# EAGLE board NICBP v3 (EAGLE 8.1.0)
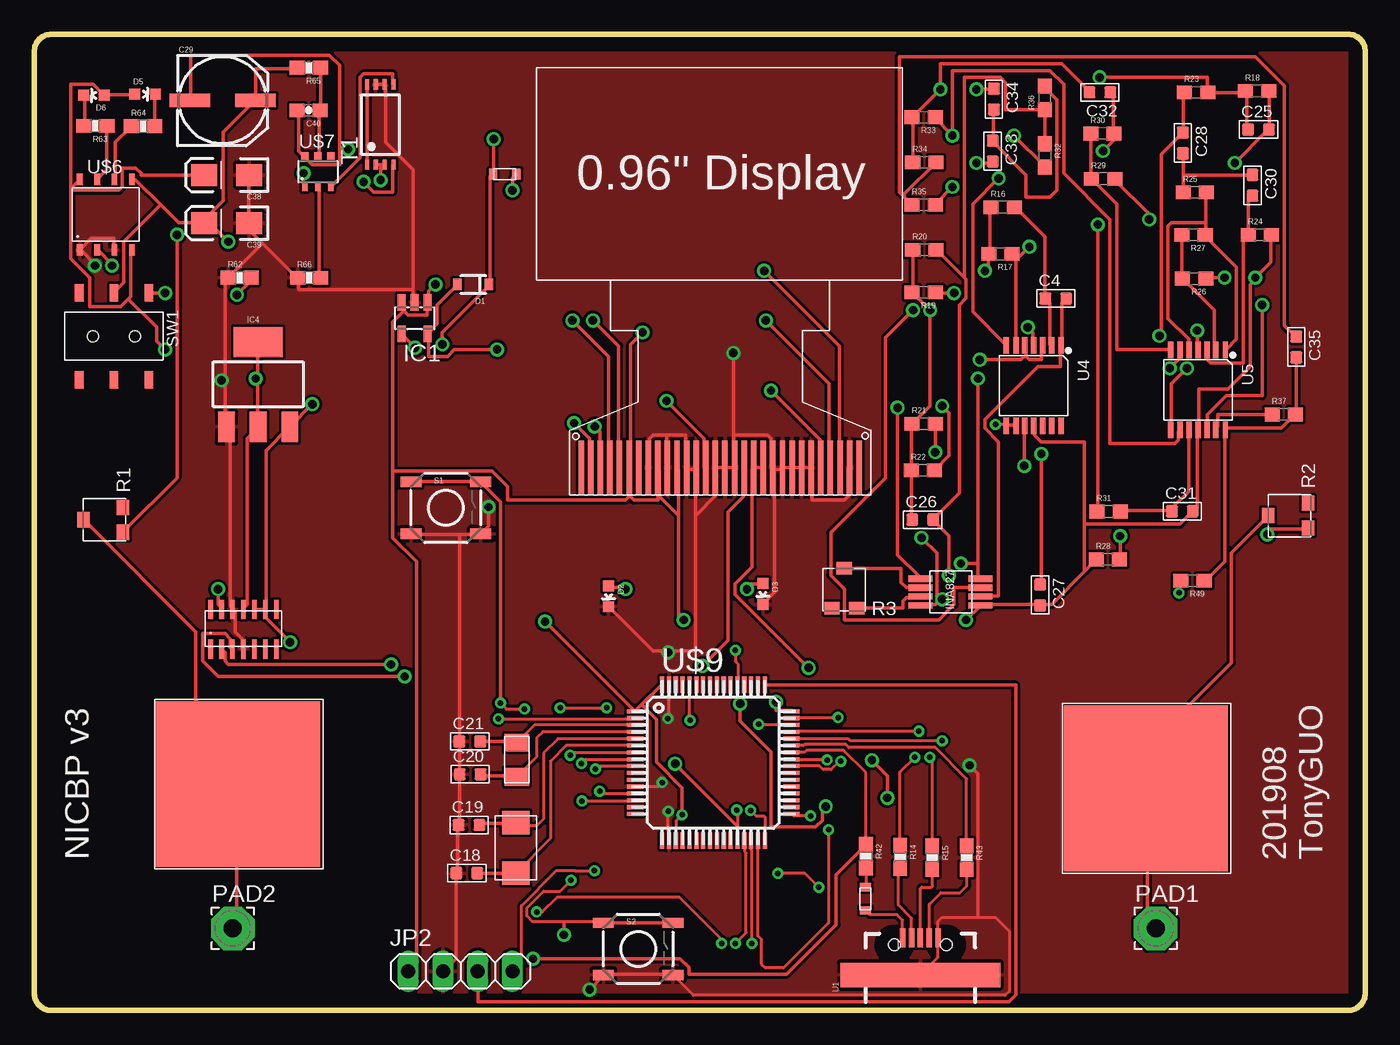
[diagram p0: board, top side]
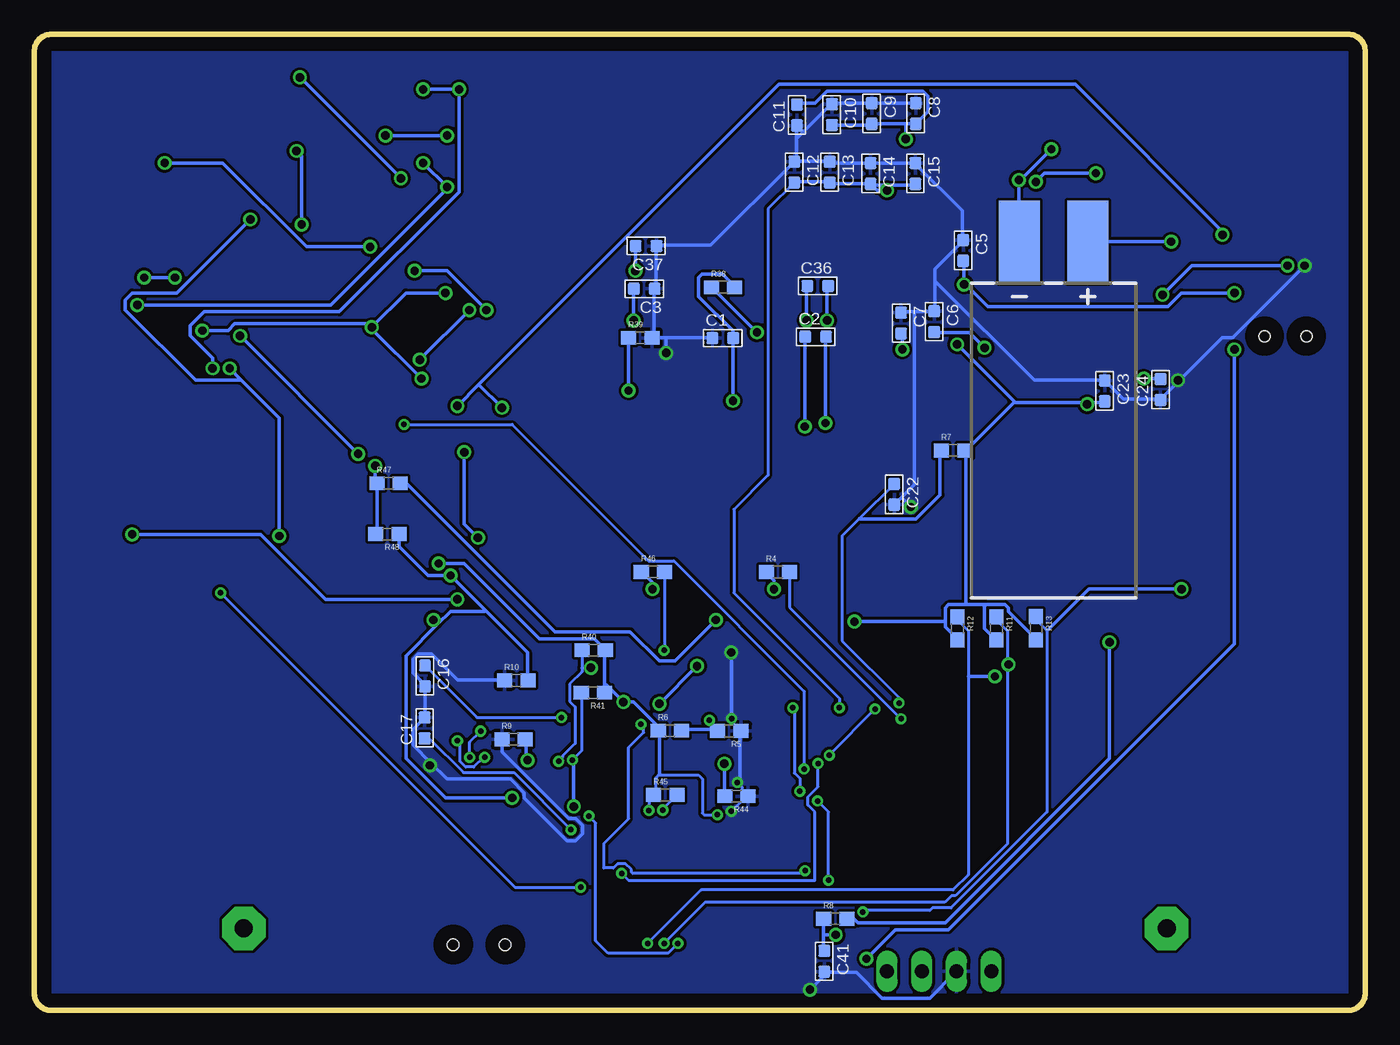
[diagram p1: board, bottom side, seen from below]

Size 97.2 x 71.3 mm. Coordinates in mm from the lower left corner, seen from the top.
Outline: 1.27,71.3 95.93,71.3 arc-90 97.2,70.03 97.2,1.27 arc-90 95.93,0 1.27,0 arc-90 0,1.27 0,70.03 arc-90 1.27,71.3
Copper layers (1*16): Top 0.035mm / dielectric 1.5mm / Bottom 0.035mm
Design rules "default": minimum track width 10mil, minimum drill 24mil, track to track 8mil, track to pad 8mil, pad to pad 8mil, via to via 8mil, smd to smd 8mil, copper to edge 40mil, drill to drill 8mil, minimum pad ring 10mil, minimum via ring 8mil, stop-mask expansion 4mil, vias tented up to drill 0mil, thermal gap 10mil

## Footprints (pad centres in the part's own frame; a part is rotated, then mirrored left to right if it is on the bottom)
LIPO-110-TABS = smd 3 x 6: + 2.5,14.5; - -2.5,14.5
C0603 = smd 0.889 x 0.889: 1 0,0.762; 2 0,-0.762
NIPPON_F80 = smd 2.95 x 1: + 2.4,0; - -2.4,0
EIA3216-KIT = smd 1.9 x 1.6: A 1.65,0; C -1.65,0
0603-CAP = smd 1.1 x 1: 1 -0.85,0; 2 0.85,0
SOD-323 = smd 0.63 x 0.83: 1 -1.15,0; 2 1.15,0
LED-0603 = smd 0.8 x 0.8: A 0,-0.75; C 0,0.75
SOT23-5L = smd 0.6 x 1.2: 1 -0.95,-1.15; 2 0,-1.15; 3 0.95,-1.15; 4 0.95,1.15; 5 -0.95,1.15
SOT223 = smd 1.219 x 2.235: 1 -2.311,-3.099; 2 0,-3.099; 3 2.311,-3.099 | smd 3.6 x 2.2: 4 0,3.099
1X04 = drill 1.016 long: 1 -3.81,0; 2 -1.27,0; 3 1.27,0; 4 3.81,0
3,17/1,3 = drill 1.321 pad 3.175 octagon: 1 0,0
TRIMPOT_TC33 = smd 1.1 x 0.9: 1 -0.91,-1.45; 2 0,1.45; 3 0.91,-1.45
0603 = smd 1.1 x 1: 1 -0.85,0; 2 0.85,0
0603-RES = smd 1.1 x 1: 1 -0.85,0; 2 0.85,0
TACTILE_SWITCH_SMD = smd 1.524 x 0.762: 1 -2.54,1.905; 2 2.54,1.905; 3 -2.54,-1.905; 4 2.54,-1.905
SW6-2.54-SMD-7.0X3.5X1.5MM = smd 1.27 x 0.635: CH1A -3.175,2.54; CH1B -3.175,-2.54; CH2A 3.175,2.54; CH2B 3.175,-2.54; COM1 -3.175,0; COM2 3.175,0 | hole 0.813: 0,1.524; 0,-1.524
TSSOP-8 = smd 0.3 x 0.75: 1 -0.975,-2.925; 2 -0.325,-2.925; 3 0.325,-2.925; 4 0.975,-2.925; 5 0.975,2.925; 6 0.325,2.925; 7 -0.325,2.925; 8 -0.975,2.925
USB-MICRO-SMD = smd 1.4 x 0.4: D+1 2.7,0; D-1 2.7,0.65; GND1 2.7,-1.3; ID1 2.7,-0.65; VBUS1 2.7,1.3 | smd 1.778 x 11.684: GND 0,0 | hole 0.85: 2.2,1.9; 2.2,-1.9
TSSOP14-0.65-5X4.4MM = smd 0.4 x 1.2: 1 -2,-2.925; 2 -1.3,-2.925; 3 -0.65,-2.925; 4 0,-2.925; 5 0.65,-2.925; 6 1.3,-2.925; 7 2,-2.925; 8 2,2.925; 9 1.3,2.925; 10 0.65,2.925; 11 0,2.925; 12 -0.65,2.925; 13 -1.3,2.925; 14 -2,2.925
NX5032CA-8MHZ = smd 1.7 x 2: 1 0,0; 2 3.7,0
FCM1608KF-601T03 = smd 0.6 x 0.8: 1 -0.05,0.4; 2 1.65,0.4
32.768KHZ-FC-135 = smd 1.3 x 1.8: 1 0,0; 2 2.5,0
INA827 = smd 1.75 x 0.45: 1 -3,3; 2 -3,2.35; 3 -3,1.7; 4 -3,1.05; 5 1.4,1.05; 6 1.4,1.7; 7 1.4,2.35; 8 1.4,3
SOT23-8 = smd 0.42 x 0.835: 1 -1.905,-2.58; 2 -0.635,-2.58; 3 0.635,-2.58; 4 1.905,-2.58; 5 1.905,2.58; 6 0.635,2.58; 7 -0.635,2.58; 8 -1.905,2.58
SOT23-6 = smd 0.4 x 0.55: 1 -0.95,-1.15; 2 0,-1.15; 3 0.95,-1.15 | smd 0.55 x 0.55: 4 0.95,1.15; 5 0,1.15; 6 -0.95,1.15
CAPSENSE_PAD = smd 12 x 6.1: P$1 0,3; P$2 0,-3
TQFP64 = smd 1.2 x 0.3: 1 -5.7,3.75; 2 -5.7,3.25; 3 -5.7,2.75; 4 -5.7,2.25; 5 -5.7,1.75; 6 -5.7,1.25; 7 -5.7,0.75; 8 -5.7,0.25; 9 -5.7,-0.25; 10 -5.7,-0.75; 11 -5.7,-1.25; 12 -5.7,-1.75; 13 -5.7,-2.25; 14 -5.7,-2.75; 15 -5.7,-3.25; 16 -5.7,-3.75; 33 5.7,-3.75; 34 5.7,-3.25; 35 5.7,-2.75; 36 5.7,-2.25; 37 5.7,-1.75; 38 5.7,-1.25; 39 5.7,-0.75; 40 5.7,-0.25; 41 5.7,0.25; 42 5.7,0.75; 43 5.7,1.25; 44 5.7,1.75; 45 5.7,2.25; 46 5.7,2.75; 47 5.7,3.25; 48 5.7,3.75 | smd 0.3 x 1.2: 17 -3.75,-5.7; 18 -3.25,-5.7; 19 -2.75,-5.7; 20 -2.25,-5.7; 21 -1.75,-5.7; 22 -1.25,-5.7; 23 -0.75,-5.7; 24 -0.25,-5.7; 25 0.25,-5.7; 26 0.75,-5.7; 27 1.25,-5.7; 28 1.75,-5.7; 29 2.25,-5.7; 30 2.75,-5.7; 31 3.25,-5.7; 32 3.75,-5.7; 49 3.75,5.7; 50 3.25,5.7; 51 2.75,5.7; 52 2.25,5.7; 53 1.75,5.7; 54 1.25,5.7; 55 0.75,5.7; 56 0.25,5.7; 57 -0.25,5.7; 58 -0.75,5.7; 59 -1.25,5.7; 60 -1.75,5.7; 61 -2.25,5.7; 62 -2.75,5.7; 63 -3.25,5.7; 64 -3.75,5.7
MAX30100 = smd 1.397 x 0.35: 1 -0.381,4.8; 2 -0.381,4; 3 -0.381,3.2; 4 -0.381,2.4; 5 -0.381,1.6; 6 -0.381,0.8; 7 -0.381,0; 8 2.531,0; 9 2.531,0.8; 10 2.531,1.6; 11 2.531,2.4; 12 2.531,3.2; 13 2.531,4; 14 2.531,4.8
ER-OLED0.96 = smd 0.4 x 4: P$1 0.85,2; P$2 1.55,2; P$3 2.25,2; P$4 2.95,2; P$5 3.65,2; P$6 4.35,2; P$7 5.05,2; P$8 5.75,2; P$9 6.45,2; P$10 7.15,2; P$11 7.85,2; P$12 8.55,2; P$13 9.25,2; P$14 9.95,2; P$15 10.65,2; P$16 11.35,2; P$17 12.05,2; P$18 12.75,2; P$19 13.45,2; P$20 14.15,2; P$21 14.85,2; P$22 15.55,2; P$23 16.25,2; P$24 16.95,2; P$25 17.65,2; P$26 18.35,2; P$27 19.05,2; P$28 19.75,2; P$29 20.45,2; P$30 21.15,2

## Placement (x,y rotation side)
BAT1  [LIPO-110-TABS]  22.76,41.64 0 bottom
C1  0.1uf  [C0603]  46.92,49.11 90 bottom
C2  1uf  [C0603]  40.14,49.21 90 bottom
C3  4.7uf  [C0603]  52.66,52.71 270 bottom
C4  0.1uf  [C0603]  74.6,52 90 top
C5  0.1uf  [C0603]  29.36,55.51 0 bottom
C6  0.1uf  [C0603]  31.48,50.31 0 bottom
C7  0.1uf  [C0603]  33.9,50.21 0 bottom
C8  0.1uf  [C0603]  32.82,65.51 0 bottom
C9  0.1uf  [C0603]  36.04,65.51 0 bottom
C10  1uf  [C0603]  38.95,65.43 0 bottom
C11  1uf  [C0603]  41.5,65.4 180 bottom
C12  0.1uf  [C0603]  41.69,61.23 0 bottom
C13  0.1uf  [C0603]  39.11,61.23 0 bottom
C14  0.1uf  [C0603]  36.13,61.13 0 bottom
C15  0.1uf  [C0603]  32.85,61.13 0 bottom
C16  2.2uf  [C0603]  68.67,24.43 0 bottom
C17  2.2uf  [C0603]  68.69,20.63 180 bottom
C18  22pF  [C0603]  31.59,10.03 90 top
C19  22pF  [C0603]  31.75,13.55 90 top
C20  12.5pF  [C0603]  31.83,17.25 90 top
C21  12.5pF  [C0603]  31.81,19.65 90 top
C22  0.1uf  [C0603]  34.4,37.7 0 bottom
C23  0.1uf  [C0603]  19.03,45.25 0 bottom
C24  0.1uf  [C0603]  14.95,45.35 180 bottom
C25  0.1uf  [C0603]  89.4,64.34 90 top
C26  0.1uf  [C0603]  64.88,35.84 90 top
C27  0.1uf  [C0603]  73.46,30.34 0 top
C28  0.1uf  [C0603]  83.88,63.36 0 top
C29  100uF  [NIPPON_F80]  13.76,66.46 0 top
C30  0.1uf  [C0603]  88.96,60.26 0 top
C31  0.1uf  [C0603]  83.84,36.46 90 top
C32  0.1uf  [C0603]  77.82,67.06 270 top
C33  0.1uf  [C0603]  70,62.76 0 top
C34  0.1uf  [C0603]  70.08,66.56 0 top
C35  0.22uf  [C0603]  92.16,48.46 0 top
C36  1uf  [C0603]  39.98,52.91 90 bottom
C37  1uf  [C0603]  52.52,55.83 270 bottom
C38  10uF/10v  [EIA3216-KIT]  14.05,61.02 180 top
C39  10uF/10v  [EIA3216-KIT]  14.05,57.5 180 top
C40  0.1uF  [0603-CAP]  20.04,65.74 180 top
C41  0.1uf  [C0603]  39.5,3.6 0 bottom
D1  BAT20JFILM  [SOD-323]  32.06,53.02 180 top
D2  BLUE  [LED-0603]  41.95,30.24 180 top
D3  BLUE  [LED-0603]  53.21,30.42 180 top
D5  BLUE  [LED-0603]  8.1,66.93 270 top
D6  BLUE  [LED-0603]  4.36,66.83 90 top
IC1  LD398530RM  [SOT23-5L]  27.78,50.56 180 top
IC4  LDO_1V8  [SOT223]  16.35,45.73 0 top
JP2  [1X04]  31.12,2.86 0 top
PAD1  [3,17/1,3]  81.9,6 0 top
PAD2  [3,17/1,3]  14.5,6 0 top
R1  1M  [TRIMPOT_TC33]  5.04,35.84 90 top
R2  1M  [TRIMPOT_TC33]  91.56,36.14 90 top
R3  100k  [TRIMPOT_TC33]  59.15,30.84 0 top
R4  1k  [0603]  42.89,32.02 0 bottom
R5  10k  [0603]  46.44,20.42 180 bottom
R6  10k(N.M)  [0603]  50.78,20.44 0 bottom
R7  10k  [0603]  30.1,40.9 0 bottom
R8  10k  [0603]  38.7,6.7 0 bottom
R9  0R  [0603]  62.2,19.8 0 bottom
R10  0R(N.M)  [0603]  62,24.1 0 bottom
R11  4.7k  [0603]  26.94,27.9 270 bottom
R12  4.7k  [0603]  29.79,27.9 270 bottom
R13  4.7k  [0603]  24.05,27.92 270 bottom
R14  22R  [0603-RES]  63.23,11.22 270 top
R15  22R  [0603-RES]  65.58,11.17 270 top
R16  1M  [0603]  70.72,58.66 0 top
R17  5.1k  [0603]  70.55,55.25 180 top
R18  5.1k  [0603]  89.3,67.15 0 top
R19  10k  [0603]  64.95,52.45 180 top
R20  10k  [0603]  65,55.55 0 top
R21  2M  [0603]  64.95,42.85 0 top
R22  2M  [0603]  64.9,39.45 0 top
R23  100  [0603]  84.85,67.05 0 top
R24  1.8M  [0603]  89.5,56.65 0 top
R25  1.8M  [0603]  84.75,59.75 0 top
R26  12k  [0603]  84.7,53.45 180 top
R27  5.1k  [0603]  84.65,56.64 180 top
R28  12k  [0603]  78.4,32.94 0 top
R29  100k  [0603]  78.05,60.74 0 top
R30  7.5k  [0603]  78,64.04 0 top
R31  7.5k  [0603]  78.45,36.44 0 top
R32  12k  [0603]  73.8,62.44 270 top
R33  5.6k  [0603]  64.95,65.24 180 top
R34  27k  [0603]  65,61.94 0 top
R35  27k  [0603]  64.95,58.84 0 top
R36  9.1k  [0603]  73.8,66.64 90 top
R37  12k  [0603]  91.25,43.53 0 top
R38  10k  [0603]  46.9,52.82 0 bottom
R39  390k  [0603]  52.95,49.12 0 bottom
R40  4.7k  [0603]  56.35,26.31 0 bottom
R41  4.7k  [0603]  56.4,23.21 180 bottom
R42  0  [0603-RES]  60.73,11.27 270 top
R43  0  [0603-RES]  68.08,11.16 270 top
R44  10k  [0603]  45.92,15.65 180 bottom
R45  10k(N.M)  [0603]  51.12,15.74 0 bottom
R46  1k  [0603]  52.02,32.03 0 bottom
R47  1.6M  [0603]  71.32,38.51 0 bottom
R48  4.3M  [0603]  71.42,34.8 180 bottom
R49  0  [0603]  84.58,31.39 180 top
R62  2K  [0603-RES]  15,53.52 0 top
R63  1K  [0603-RES]  4.46,64.6 180 top
R64  1K  [0603-RES]  7.95,64.58 0 top
R65  100R  [0603-RES]  20.05,68.85 180 top
R66  1K  [0603-RES]  20.07,53.51 0 top
S1  [TACTILE_SWITCH_SMD]  30.06,36.71 0 top
S2  [TACTILE_SWITCH_SMD]  44.1,4.5 0 top
SW1  [SW6-2.54-SMD-7.0X3.5X1.5MM]  5.83,49.24 270 top
T1  DMN3024LSD  [TSSOP-8]  25.27,64.7 0 top
U1  [USB-MICRO-SMD]  64.71,2.6 90 top
U4  LM324PW-TSSOP14  [TSSOP14-0.65-5X4.4MM]  72.99,45.64 180 top
U5  LM324PW-TSSOP14  [TSSOP14-0.65-5X4.4MM]  84.98,45.34 180 top
U$2  NX5032CA-8MHZ  [NX5032CA-8MHZ]  35.17,13.73 270 top
U$3  FCM1608KF-601T03  [FCM1608KF-601T03]  33.56,60.67 0 top
U$4  32.768KHZ-FC-135  [32.768KHZ-FC-135]  35.23,19.56 270 top
U$5  INA827  [INA827]  67.71,28.53 0 top
U$6  TP4056  [SOT23-8]  5.23,58.13 0 top
U$7  DW01  [SOT23-6]  20.72,61.25 0 top
U$8  CAPSENSE_PAD  [CAPSENSE_PAD]  81.18,16.23 0 top
U$9  STM32F405R  [TQFP64]  49.6,18.1 0 top
U$10  CAPSENSE_PAD  [CAPSENSE_PAD]  14.88,16.53 0 top
U$12  MAX30100  [MAX30100]  17.68,26.77 90 top
U$13  ER-OLED0.96  [ER-OLED0.96]  39.09,37.64 0 top
U$15  FCM1608KF-601T03  [FCM1608KF-601T03]  61.09,7.36 90 top

## Library data of the parts
BAT1 R1-R3 U$8 U$10 = SparkFun-Electromechanical
C1-C28 C30-C37 C41 = Seeed-OPL-Capacitor; MPN: CC0603KRX5R6BB475
C29 C38 C39 = SparkFun-Capacitors
C40 = SparkFun-Capacitors; PROD_ID: CAP-08390
D1 = SparkFun-DiscreteSemi; PROD_ID: DIO-11623
D2 D3 D5 D6 = SparkFun-LED; PROD_ID: DIO-08575
IC1 = st-microelectronics
IC4 = SparkFun-PowerIC
JP2 = pinhead
PAD1 PAD2 = wirepad
R4-R13 R16-R41 R44-R49 = SparkFun-Resistors; PROD_ID: RES-08609
R14 R15 R42 R43 = SparkFun-Resistors; PROD_ID: RES-07864
R62-R66 = SparkFun-Resistors; PROD_ID: RES-07856
S1 S2 = SparkFun-Electromechanical; PROD_ID: SWCH-08247
SW1 = Seeed-OPL-Switch
T1 = FS8205A
U1 = MicroUSB Long GND
U4 U5 = Seeed-OPL-ic; MPN: LM324PW
U$2 = NX5032CA-8MHZ
U$3 U$15 = FCM1608KF-601T03
U$4 = 32.768KHZ-FC-135
U$5 = INA827
U$6 = TP4056
U$7 = DW01
U$9 = stm32f4
U$12 = MAX30100
U$13 = ER-OLED0.96

## Nets
1V8: C24.2 IC4.2 IC4.4 U$12.11
ADC1: C35.2 R37.2 R49.1 U5.14
AGND: C26.2 C27.2 C31.2 R9.2 R10.2 R20.2 R24.2 R26.1 R28.1 R32.1 R36.1 R48.1 U4.11 U5.11 U$5.5
B1: C41.1 R8.1 S2.1 S2.2 U$9.14
BAT: U4.8 U4.9 U$9.9
BOOT0: R5.2 R6.2 U$9.60
BOOT1: R44.2 R45.2 U$9.28
ECG: R49.2 U$9.8
GND: C1.1 C3.1 C5.1 C6.1 C7.1 C8.1 C9.1 C10.1 C11.1 C12.1 C13.1 C14.1 C15.1 C16.2 C17.2 C18.1 C19.1 C20.1 C21.1 C22.2 C23.1 C24.1 C37.1 C38.C C39.C C41.2 D2.C D3.C IC1.2 IC4.1 JP2.2 R5.1 R9.1 R10.1 R39.2 R44.1 R62.1 R66.1 S1.3 S1.4 S2.3 S2.4 T1.6 T1.7 U1.GND U1.GND1 U$6.1 U$6.3 U$9.12 U$9.18 U$9.63 U$12.4 U$12.12 U$13.P$8 U$13.P$10 U$13.P$12 U$13.P$13 U$13.P$15 U$13.P$16 U$13.P$17 U$13.P$21 U$13.P$22 U$13.P$23 U$13.P$24 U$13.P$25 U$13.P$29
I2C2_SCL: R11.1 U$9.29 U$12.2
I2C2_SDA: R12.1 U$9.30 U$12.3
I2C3_SCL: R41.2 U$9.41 U$13.P$18
I2C3_SDA: R40.1 U$9.40 U$13.P$19 U$13.P$20
INT_EXTI12: R13.1 U$9.33 U$12.13
L_ARM: PAD2.1 R1.2 U$10.P$1 U$10.P$2
LED1: R46.2 U$9.53
LED2: R4.2 U$9.2
MCU_3V3: C8.2 C9.2 C10.2 C11.2 C23.2 D1.1 IC4.3 R6.1 R7.2 R8.2 R11.2 R12.2 R13.2 R19.1 R40.2 R41.1 R45.1 U4.4 U5.4 U$3.1 U$5.8 U$9.1 U$9.19 U$9.32 U$9.48 U$9.64 U$12.9 U$12.10
N$1: BAT1.+ C29.+ C39.A R65.2 SW1.COM1 U$6.5
N$2: D2.A R4.1
N$3: C17.1 U$9.31
N$5: C16.1 U$9.47
N$6: C6.2 IC1.4
N$7: C7.2 D1.2 IC1.5
N$8: C27.1 C28.1 R23.1
N$9: R47.1 R48.2 U4.10
N$11: C1.2 R38.2 U$13.P$14
N$12: C2.1 U$13.P$3
N$13: R14.2 U1.D-1
N$14: R3.3 U$5.3
N$15: R3.2 U$5.2
N$16: R1.1 R22.2 U$5.1
N$17: R2.1 R21.2 U$5.4
N$18: C4.2 U4.1 U$5.6
N$19: C4.1 R16.2 U4.2
N$20: R16.1 R17.2 U$5.7
N$21: C25.2 R17.1 R18.2 U4.6
N$22: C25.1 R18.1 R23.2 U4.7
N$23: R15.2 U1.D+1
N$24: C26.1 R19.2 R20.1 R21.1 R22.1 U4.3 U4.5
N$25: R26.2 R27.2 U5.2
N$26: R25.2 R27.1 U5.1 U5.5
N$27: C30.2 R24.1 U5.3
N$28: C28.2 C30.1 R25.1
N$29: R28.2 R29.2 U5.6
N$30: R29.1 R30.1 U5.7
N$31: C32.1 R30.2 R31.1
N$32: C31.1 R31.2 U5.10
N$33: C32.2 C34.1 R33.2 R34.1 U5.8
N$34: R32.2 R33.1 U5.9
N$35: C35.1 R34.2 R35.1
N$36: C33.1 C34.2 R36.2
N$37: C33.2 R35.2 U5.12
N$38: R37.1 U5.13
N$39: C36.1 U$13.P$5
N$40: C2.2 U$13.P$2
N$41: C36.2 U$13.P$4
N$42: R39.1 U$13.P$26
N$43: C3.2 U$13.P$27
N$44: C37.2 U$13.P$28
N$45: R43.2 U1.ID1
N$46: U1.VBUS1 U$15.1
N$47: R42.2 U$15.2
N$48: D3.A R46.1
N$58: R62.2 U$6.2
N$59: R63.1 U$6.7
N$60: R64.1 U$6.6
N$61: D6.C R63.2
N$62: D5.C R64.2
N$65: C40.1 R65.1 U$7.5
N$66: BAT1.- C29.- C40.2 T1.2 T1.3 U$7.6
N$67: T1.4 U$7.1
N$68: R66.2 U$7.2
N$69: T1.1 T1.8
N$70: T1.5 U$7.3
NRST: C22.1 R7.1 S1.1 S1.2 U$9.7
OSC32_IN: C21.2 U$4.1 U$9.3
OSC32_OUT: C20.2 U$4.2 U$9.4
OSC_IN: C19.2 U$2.1 U$9.5
OSC_OUT: C18.2 U$2.2 U$9.6
OTG_FS_DM: R14.1 U$9.44
OTG_FS_DP: R15.1 U$9.45
OTG_FS_ID: R43.1 U$9.43
R_ARM: PAD1.1 R2.2 U$8.P$1 U$8.P$2
SWTCK: JP2.3 U$9.49
SWTDIO: JP2.4 U$9.46
VBUS: C38.A D5.A D6.A R42.1 U$6.4 U$6.8 U$9.42
VCC: C5.2 IC1.1 IC1.3 JP2.1 R38.1 R47.2 SW1.CH1A U$13.P$6 U$13.P$9 U$13.P$11
VDDA: C12.2 C13.2 C14.2 C15.2 U$3.2 U$9.13

## Tracks (layer width: path | path; a pad name or v marks a point on that pad's centre or on a via)
1V8  (via drill 0.61)
  Top 0.254: IC4.4 16.3,48.77 16.3,46.27 v16.18,46.15 16.18,46.02 16.3,45.9 16.3,42.65 IC4.2 16.3,42.52 15.55,41.77 15.55,29.65 15.3,29.4 U$12.11
  Bottom 0.254: v16.18,46.15 15.05,46.15 C24.2
ADC1
  Top 0.254: C35.2 92.17,47.65 92.17,43.65 R37.2 92.05,43.52 91.05,42.52 87.05,42.52 U5.14 86.92,42.4 86.92,32.77 85.55,31.4 R49.1
AGND  (via drill 0.61)
  Top 0.254: R32.1 R36.1 73.67,65.78 70.92,65.78 70.92,67.78 70.55,68.15 67.92,68.15 67.92,53.65 67.86,53.59 | 67.86,53.59 65.92,55.52 R20.2 | 67.86,53.59 68.05,53.4 68.05,52.02 67.55,51.52 67.55,37.77 65.67,35.9 C26.2 65.67,35.77 66.8,34.65 v66.8,31.77 | v61.17,18.27 62.3,17.15 v62.3,15.53 | v86.92,53.52 85.55,53.52 R26.1 | R24.2 90.3,56.65 90.3,54.65 v89.17,53.52 89.17,53.4 88.8,53.02 88.8,47.02 87.17,45.4 85.05,45.4 85.05,42.52 U5.11 84.92,42.4 84.92,36.77 84.67,36.52 C31.2 84.55,36.4 83.67,35.52 76.67,35.52 | 76.74,32.09 74.3,29.65 73.55,29.65 C27.2 73.42,29.65 69.17,29.65 U$5.5 69.05,29.52 v68.05,28.52 | 76.74,32.09 77.55,32.9 R28.1 | 76.67,35.52 76.67,32.15 76.74,32.09 | 76.67,35.52 76.67,41.52 73.55,41.52 73.05,42.02 73.05,42.65 U4.11
  Bottom 0.254: 64.24,29.21 v66.8,31.77 68.42,31.77 70.55,33.9 70.55,34.77 R48.1 | 64.24,29.21 61.17,26.15 61.17,24.15 R10.2 | v61.17,18.27 61.3,18.4 61.3,19.77 R9.2 | v62.3,15.53 67.17,15.53 70.05,18.4 70.05,25.9 67.74,28.21 | 67.74,28.21 66.8,29.15 64.3,29.15 64.24,29.21 | v89.17,53.52 v86.92,53.52 | v68.05,28.52 67.74,28.21
B1  (via drill 0.4 pad 0.25, 0.61)
  Top 0.206: v39.2,9.51 38.4,8.71 37.21,8.71 35.98,7.48 35.98,6.9 36.4,6.48 38.67,6.48 41.48,6.48 S2.1 | v40,15.3 43.17,15.3 43.17,15.31 43.86,15.31 U$9.14
  Top 0.254: S2.2 46.55,6.4 41.67,6.4 S2.1 | 38.67,6.48 v38.67,5.53
  Bottom 0.206: v39.2,9.51 39.2,14.5 v40,15.3
  Bottom 0.254: R8.1 39.55,5.53 | 39.55,5.53 39.55,4.4 C41.1 | v38.67,5.53 39.55,5.53
BAT  (via drill 0.4 pad 0.25)
  Top 0.206: U4.8 70.91,42.8 v70.2,42.8 | v40.97,17.64 41.18,17.85 U$9.9
  Top 0.254: U4.9 71.67,42.77 71.05,42.77 U4.8
  Bottom 0.206: v70.2,42.8 62.3,42.8 52.34,32.84 50.49,32.84 40.97,23.32 v40.97,17.64
BOOT0  (via drill 0.4 pad 0.25)
  Top 0.206: v47.9,21.2 47.85,21.25 U$9.60
  Bottom 0.206: R5.2 47.9,21.03 v47.9,21.2
  Bottom 0.254: R6.2 49.92,20.52 47.42,20.52 R5.2
BOOT1  (via drill 0.4 pad 0.25, 0.61)
  Top 0.206: v51.3,14.63 51.35,14.58 51.35,13.53 U$9.28
  Top 0.254: v46.8,18.02 51.3,13.53 51.35,13.53
  Bottom 0.206: R45.2 51.3,14.71 v51.3,14.63
  Bottom 0.254: v46.8,18.02 46.8,15.65 R44.2
ECG  (via drill 0.4 pad 0.25)
  Top 0.206: R49.2 83.6,31.26 v83.6,30.5 | v57.29,9 56.29,10 v54.3,10 | v39.97,18.03 40.28,18.35 U$9.8
  Bottom 0.206: v83.6,30.5 62.1,9 v57.29,9 | v54.3,10 53.8,9.5 40.2,9.5 40.2,14.5 40.71,15.01 40.71,15.59 39.97,16.34 v39.97,18.03
GND  (via drill 0.4 pad 0.25, 0.61)
  Top 0.206: U1.GND 66.01,3.9 U1.GND1 66.01,6.51 66.3,6.8 68.92,6.8 70.2,6.8 71.2,5.8 71.2,1.4 70.9,1.1 48.13,1.1 S2.4 | U$9.18 46.31,12.44 46.31,13.13 46.3,13.13 v46.3,14.54 | v46.28,21.32 46.35,21.39 U$9.63 | U$9.12 45.56,16.35 v45.86,16.64
  Top 0.254: S2.4 46.55,2.65 41.67,2.65 S2.3 41.55,2.52 v40.55,1.52 | 31.05,34.77 32.55,34.77 S1.4 32.67,34.9 33.17,35.4 v33.17,36.77 | 31.05,34.77 27.55,34.77 S1.3 | 31.05,34.77 31.05,19.77 C21.1 31.05,17.27 C20.1 31.05,17.15 31.05,13.65 C19.1 30.93,13.53 30.93,10.15 C18.1 30.8,9.9 30.8,3.77 29.93,2.9 JP2.2 | v68.3,17.9 68.92,17.27 68.92,6.8 | T1.7 25.05,67.65 25.55,67.65 T1.6 25.68,67.53 25.68,63.4 27.68,61.4 27.68,52.65 | 27.68,52.65 27.68,51.77 IC1.2 | U$12.4 15.18,26.4 15.18,27.15 14.68,27.65 14.68,29.15 14.55,29.27 U$12.12 14.43,29.4 14.3,29.52 14.3,42.27 14.05,42.52 IC4.1 13.93,42.65 13.93,46.02 | 16.61,56.09 15.8,56.9 15.8,57.4 C39.C 15.68,57.52 15.68,60.9 C38.C | 16.61,56.09 19.18,53.52 R66.1 19.3,53.4 19.3,52.65 27.68,52.65 | 16.61,56.09 16.55,56.02 16.55,55.9 14.18,53.52 R62.1 14.05,53.4 13.93,53.27 13.93,46.02 | U$13.P$29 59.42,39.52 59.42,37.52 59.17,37.27 56.8,37.27 56.8,39.52 U$13.P$25 56.67,39.65 U$13.P$24 55.92,39.65 55.42,39.65 U$13.P$23 55.3,39.65 54.67,39.65 U$13.P$22 54.55,39.52 54.05,39.52 | 54.05,39.52 54.05,30.52 53.3,29.77 D3.C | 54.05,39.52 U$13.P$21 53.92,39.65 53.8,39.77 53.8,41.77 53.55,42.02 51.05,42.02 | 46.17,42.02 45.17,42.02 44.92,41.77 44.92,39.65 U$13.P$8 | 46.17,42.02 46.17,39.65 U$13.P$10 | 46.3,26.27 48.3,26.27 48.3,36.27 | 46.3,26.27 45.17,26.27 42.05,29.4 D2.C | 48.3,36.27 48.3,39.52 U$13.P$13 48.17,39.52 47.67,39.52 U$13.P$12 47.55,39.65 47.55,42.02 46.17,42.02 | v46.3,26.15 46.3,26.27 | 48.3,36.27 48.42,36.27 49.67,37.52 49.67,39.52 U$13.P$15 49.8,39.65 50.42,39.65 U$13.P$16 50.55,39.65 51.05,39.65 U$13.P$17 51.05,39.77 51.05,42.02
  Top 0.254: U$6.3 5.8,55.65 5.8,56.4 4.17,56.4 U$6.1 3.42,55.52 4.42,54.52 v4.42,54.4 | v51.05,48.02 51.05,42.02 | v13.68,46.02 13.93,46.02
  Bottom 0.206: v46.3,14.54 45.19,15.65 R44.1 45.5,16.08 45.5,16.3 45.84,16.64 v45.86,16.64 | R5.1 46.28,21.11 v46.28,21.32
  Bottom 0.254: R9.1 63.05,18.9 58.17,14.03 57.67,14.03 57.17,13.53 57.17,12.9 57.67,12.4 58.3,12.4 61.42,15.53 61.42,15.9 62.42,16.9 67.05,16.9 68.24,18.09 | 68.24,18.09 69.55,19.4 69.55,20.52 68.8,21.27 C17.2 68.67,21.4 68.67,23.65 C16.2 68.67,23.77 69.55,24.65 69.55,25.65 69.17,26.02 68.17,26.02 66.3,24.15 62.92,24.15 R10.1 | JP2.2 29.93,2.77 31.8,0.9 35.3,0.9 37.17,2.77 39.42,2.77 C41.2 39.42,2.65 v40.55,1.52 | v68.3,17.9 68.3,18.02 68.24,18.09 | R5.1 45.67,20.4 45.67,16.52 v45.86,16.64 | v46.3,26.15 46.3,21.4 v46.28,21.32 | v4.42,54.4 9.68,49.15 10.43,49.15 13.61,45.96 | 13.61,45.96 14.93,44.65 C24.1 15.05,44.65 17.68,44.65 18.93,45.9 C23.1 19.05,46.02 24.18,46.02 31.3,53.15 31.43,53.15 | 32.92,51.02 33.8,51.02 C7.1 | 32.92,51.02 31.55,51.02 C6.1 31.43,51.15 31.43,53.15 | 31.43,53.15 31.43,54.15 29.43,56.15 C5.1 29.43,56.27 29.43,58.4 32.8,61.77 C15.1 32.92,61.9 36.05,61.9 C14.1 36.17,61.9 39.05,61.9 C13.1 39.17,62.02 41.67,62.02 C12.1 | 33.86,37.46 32.92,38.4 32.92,51.02 | 33.86,37.46 34.3,37.02 C22.2 | 51.05,49.15 52.05,49.15 R39.2 51.92,49.27 51.92,52.65 C3.1 51.8,52.77 51.8,55.77 C37.1 51.67,55.9 47.8,55.9 41.8,61.9 C12.1 | 51.05,49.15 47.8,49.15 C1.1 | C8.1 32.92,66.28 35.92,66.28 C9.1 38.92,66.28 C10.1 39.05,66.15 41.42,63.77 41.55,63.77 | 41.55,63.77 41.55,62.15 C12.1 | 41.55,63.77 41.55,64.53 C11.1 | 51.05,49.15 v51.05,48.02 | v13.68,46.02 13.61,45.96 | 33.86,37.46 v33.17,36.77
  pour Bottom: 0.5,70.9 96.2,70.9 96.5,0.6 0.8,0.6
  pour Top: 0.3,70.6 96.6,70.2 96.4,0.4 0.1,0.8
I2C2_SCL  (via drill 0.4 pad 0.25, 0.61)
  Top 0.206: v51.2,4.9 51.99,5.69 51.99,11.5 51.89,11.59 51.89,12.36 U$9.29
  Top 0.254: v26.05,25.27 14.18,25.27 13.93,25.52 13.93,26.15 13.8,26.27 U$12.2
  Bottom 0.206: R11.1 26.94,28.53 26.13,27.73 26.13,25.27 26.13,12.19 29.93,8.39 30.21,8.39 30.7,7.9 48.2,7.9 v51.2,4.9
  Bottom 0.254: v26.05,25.27 26.13,25.27
I2C2_SDA  (via drill 0.4 pad 0.25, 0.61)
  Top 0.206: v52.4,4.9 52.4,11.67 52.39,11.67 52.39,12.36 U$9.30
  Top 0.254: v27.05,24.4 13.43,24.4 12.3,25.52 12.3,27.52 13.93,27.52 14.3,27.15 14.3,26.52 14.43,26.4 U$12.3
  Bottom 0.206: R12.1 29.79,28.53 28.98,27.73 28.98,24.4 28.98,9.92 30.1,8.8 48.5,8.8 v52.4,4.9
  Bottom 0.254: 28.98,24.4 v27.05,24.4
I2C3_SCL  (via drill 0.4 pad 0.25, 0.61)
  Top 0.206: v57.9,18.3 56.03,18.3 56.03,18.31 55.34,18.31 U$9.41
  Top 0.254: v57.8,14.9 57.55,14.65 57.55,13.9 57.05,13.4 53.8,13.4 53.8,18.9 51.55,21.15 v51.55,22.4 | v48.8,25.15 50.67,27.02 50.67,36.4 51.8,37.52 51.8,39.52 U$13.P$18
  Bottom 0.206: R41.2 57.25,18.95 v57.9,18.3
  Bottom 0.254: v57.8,14.9 57.8,18.27 v57.9,18.3 | v48.8,25.15 v51.55,22.4
I2C3_SDA  (via drill 0.4 pad 0.25, 0.61)
  Top 0.206: v58.91,18.2 58.8,18.2 58.19,17.59 57.61,17.59 57.35,17.85 U$9.40
  Top 0.254: U$13.P$20 53.17,39.65 U$13.P$19 52.42,39.52 52.42,32.4 51.17,31.15 51.17,30.4 v56.55,25.02
  Bottom 0.206: R40.1 57.2,25.02 57.2,24.74 58.11,23.84 58.11,22.58 57.7,22.18 57.7,19.5 58.61,18.59 58.61,18.5 v58.91,18.2
  Bottom 0.254: 57.2,25.02 v56.55,25.02
INT_EXTI12  (via drill 0.4 pad 0.25, 0.61)
  Top 0.206: v36.69,7.19 37.09,7.19 38.2,8.3 47.1,8.3 50.3,5.1 50.3,5.01 v50.19,4.9 | v56.7,14.2 55.45,14.2 U$9.33
  Top 0.254: v13.43,30.77 13.43,29.65 13.68,29.4 U$12.13
  Bottom 0.206: R13.1 24.05,28.55 23.24,27.75 23.24,14.5 30.25,7.49 31.61,7.49 31.8,7.3 36.58,7.3 v36.69,7.19 | v50.19,4.9 v50.2,4.9 50.91,4.19 55.29,4.19 56.2,5.1 56.2,13.7 v56.7,14.2
  Bottom 0.254: v13.43,30.77 20.18,30.77 23.18,27.77 23.24,27.75
L_ARM
  Top 0.254: PAD2.1 14.55,6.03 14.8,6.28 14.8,13.53 U$10.P$2 14.93,13.65 14.93,19.52 U$10.P$1 14.8,19.65 11.8,22.65 11.8,27.65 3.67,35.77 R1.2
LED1  (via drill 0.4 pad 0.25)
  Top 0.206: v51.2,26.3 51.2,25.5 51.4,25.3 51.4,24.53 51.39,24.53 51.39,23.84 U$9.53
  Bottom 0.206: R46.2 51.17,26.33 v51.2,26.3
LED2  (via drill 0.4 pad 0.25)
  Top 0.206: v33.9,21.3 43.17,21.3 43.17,21.31 43.86,21.31 U$9.2
  Bottom 0.206: R4.2 42.04,29.44 v33.9,21.3
MCU_3V3  (via drill 0.4 pad 0.25, 0.61)
  Top 0.206: v52.31,14.6 52.71,14.2 53.3,14.2 53.35,14.15 U$9.32 | v47.31,14.3 46.85,13.84 U$9.19
  Top 0.254: v18.68,26.9 16.93,28.65 16.93,29.27 U$12.9 | U$12.10 16.18,29.27 16.8,29.27 U$12.9 | U$12.9 16.93,29.4 16.93,40.9 18.55,42.52 IC4.3 18.68,42.65 v20.3,44.27 | v67.17,52.4 65.8,52.4 R19.1 | v72.55,49.9 72.92,49.52 72.92,48.65 U4.4 | v84.92,49.65 84.92,48.27 U5.4 | v68.92,46.15 68.92,32.65 | 68.92,32.65 68.92,31.77 69.05,31.65 U$5.8 | 44.36,22.34 45.8,23.77 U$9.64 | 44.36,22.34 43.92,21.9 U$9.1 43.8,21.9 v37.3,28.4 | v54.17,22.52 54.17,21.9 55.3,21.9 U$9.48 | 44.36,22.34 45.42,21.27 45.42,18.15 47.3,16.27 47.3,14.4 v47.31,14.3 | v33.55,63.65 33.55,61.15 U$3.1 33.42,61.02 33.3,60.9 33.3,53.02 D1.1 33.17,52.9 29.8,49.52 v29.8,48.65 | v67.67,32.65 68.92,32.65
  Bottom 0.206: v52.31,14.6 52.31,15.4 R45.1 51.8,15.91 51.8,17 51.6,17.2 51.55,17.2 48.7,17.2 48.4,16.9 48.4,14.4 48.3,14.3 v47.31,14.3
  Bottom 0.254: v18.68,26.9 18.68,18.4 30.68,6.4 37.05,6.4 37.3,6.65 37.8,6.65 R8.2 | v67.17,52.4 70.05,52.4 v72.55,49.9 | v84.92,49.65 83.05,49.65 82.55,50.15 72.42,50.15 v72.55,49.9 | v68.92,46.15 72.55,49.77 v72.55,49.9 | 51.55,17.2 51.55,20.4 R6.1 51.67,20.52 51.67,20.77 53.42,22.52 v54.17,22.52 55.42,23.77 55.55,23.77 | 55.55,23.77 55.55,26.27 R40.2 55.55,26.4 56.3,27.15 60.3,27.15 65.8,32.65 v67.67,32.65 | 55.55,23.77 R41.1 | 33.55,64.78 35.92,64.78 C9.2 36.05,64.65 38.92,64.65 C10.2 | 33.55,64.78 32.92,64.78 C8.2 32.8,64.78 31.93,65.65 31.93,66.78 32.3,67.15 39.3,67.15 40.17,66.28 41.42,66.28 C11.2 | 33.55,64.78 v33.55,63.65 | 27.68,29.65 26.3,29.65 26.05,29.4 26.05,29.15 24.05,27.15 R13.2 | 27.68,29.65 27.8,29.52 27.8,27.9 27.05,27.15 R11.2 | 30.68,28.4 30.68,29.4 30.43,29.65 29.18,29.65 | 30.68,28.4 30.68,28.02 29.8,27.15 R12.2 | 27.68,29.65 29.18,29.65 | 25.68,44.4 20.3,44.4 | 20.3,44.4 19.05,44.4 C23.2 | 25.68,44.4 29.18,40.9 R7.2 29.18,40.77 29.18,29.65 | v29.8,48.65 25.68,44.52 25.68,44.4 | 30.68,28.4 v37.3,28.4 | v20.3,44.27 20.3,44.4
N$1  (via drill 0.61)
  Top 0.254: R65.2 19.18,68.78 16.18,68.78 16.18,66.53 C29.+ 16.05,66.4 13.8,64.15 13.8,59.15 12.3,57.65 C39.A | 9.24,58.84 10.55,57.52 12.3,57.52 C39.A | 9.24,58.84 7.42,60.65 7.17,60.65 U$6.5 | 9.24,58.84 6.55,56.15 6.55,53.15 5.92,52.52 SW1.COM1 | v14.18,56.15 12.55,57.77 C39.A
  Bottom 0.254: v14.18,56.15 20.18,56.15 BAT1.+
N$2  (via drill 0.61)
  Top 0.254: v43.17,30.77 43.17,30.9 42.05,30.9 D2.A
  Bottom 0.254: v43.17,30.77 43.17,31.4 43.67,31.9 R4.1
N$3  (via drill 0.4 pad 0.25)
  Top 0.206: v58,13.2 58,6.4 54.7,3.1 53.4,3.1 53.11,3.39 53.11,5.19 52.85,5.45 U$9.31
  Bottom 0.206: C17.1 68.36,19.87 65.86,17.37 62.17,17.37 v58,13.2
N$5  (via drill 0.4 pad 0.25)
  Top 0.206: v58.7,21.4 58.65,21.35 U$9.47
  Bottom 0.206: C16.1 64.88,21.4 v58.7,21.4
N$6  (via drill 0.61)
  Top 0.254: v27.8,48.4 26.93,49.27 26.93,49.4 IC1.4
  Bottom 0.254: v27.8,48.4 28.93,49.52 31.43,49.52 C6.2
N$7  (via drill 0.61)
  Top 0.254: D1.2 30.8,52.9 29.43,51.52 29.43,50.15 28.8,49.52 IC1.5 28.8,49.4 28.8,47.77 30.18,47.77 30.68,48.27 v33.8,48.27
  Bottom 0.254: v33.8,48.27 33.8,49.4 C7.2
N$8  (via drill 0.61)
  Top 0.254: v73.55,40.65 73.55,31.15 C27.1 | v82.17,49.27 82.3,49.4 82.3,62.52 83.8,64.03 C28.1 83.92,64.15 83.92,67.03 R23.1
  Bottom 0.254: v82.17,49.27 v73.55,40.65
N$9  (via drill 0.61)
  Top 0.254: v72.3,39.77 72.3,42.65 U4.10
  Bottom 0.254: R48.2 72.17,34.9 72.17,38.4 R47.1 72.3,38.4 v72.3,39.77
N$11  (via drill 0.61)
  Top 0.254: v46.17,44.52 48.92,41.77 48.92,39.65 U$13.P$14
  Bottom 0.254: R38.2 46.05,52.9 46.92,53.77 48.42,53.77 48.67,53.52 48.67,52.15 46.17,49.65 46.17,49.15 C1.2 46.17,49.02 v46.17,44.52
N$12  (via drill 0.61)
  Top 0.254: v40.92,42.65 41.3,42.27 41.3,39.65 U$13.P$3
  Bottom 0.254: v40.92,42.65 40.92,49.15 C2.1
N$13
  Top 0.206: U1.D-1 64.06,6.74 63.1,7.7 63.1,10.24 R14.2
N$14
  Top 0.254: R3.3 60.17,29.4 63.42,29.4 63.42,29.9 63.67,30.15 64.67,30.15 U$5.3
N$15
  Top 0.254: R3.2 59.17,32.27 63.3,32.27 63.3,31.27 63.67,30.9 64.67,30.9 U$5.2
N$16  (via drill 0.61)
  Top 0.254: v10.43,56.65 10.43,38.9 6.55,35.02 R1.1 | v66.3,44.15 66.8,43.65 66.8,40.52 65.8,39.52 R22.2 | v63.05,44.02 63.05,33.27 64.67,31.65 U$5.1
  Bottom 0.254: v10.43,56.65 10.43,56.9 21.18,67.65 42.8,67.65 64.74,45.71 | v66.3,44.15 64.74,45.71 | 64.74,45.71 v63.05,44.02
N$17  (via drill 0.61)
  Top 0.254: v65.8,40.77 R21.2 | v64.8,34.52 65.92,33.4 65.92,30.02 | 65.92,30.02 65.92,29.77 65.8,29.65 64.8,29.65 U$5.4 | v90.05,34.77 90.05,35.15 92.92,35.15 R2.1 | 65.92,30.02 v66.3,30.02
  Bottom 0.254: v65.8,40.77 65.8,35.52 v64.8,34.52 | v90.05,34.77 80.67,34.77 75.92,30.02 v66.3,30.02
N$18
  Top 0.254: C4.2 75.3,51.9 75.05,51.65 75.05,48.65 U4.1 74.92,48.52 74.92,47.02 73.3,47.02 69.42,43.15 69.42,42.52 70.42,41.52 70.42,30.27 69.17,30.27 U$5.6
N$19
  Top 0.254: U4.2 74.17,48.65 74.17,51.65 73.92,51.9 C4.1 73.8,52.02 73.8,56.52 71.67,58.65 R16.2
N$20  (via drill 0.61)
  Top 0.254: R16.1 69.8,58.65 69.8,55.27 R17.2 69.67,55.15 69.67,54.27 v69.42,54.02 | v64.17,51.15 62.17,49.15 62.17,38.9 58.17,34.9 58.17,31.77 59.17,30.77 59.17,28.52 66.05,28.52 67.17,29.65 67.17,30.9 69.05,30.9 U$5.7
  Bottom 0.254: v64.17,51.15 67.05,54.02 v69.42,54.02
N$21  (via drill 0.61)
  Top 0.254: R18.2 90.17,67.15 90.17,64.4 C25.2 90.05,64.28 v87.67,61.9 | U4.6 71.67,48.65 71.67,54.9 71.42,55.15 R17.1 71.8,54.9 v72.67,55.77
  Bottom 0.254: v87.67,61.9 83.42,61.9 77.3,55.77 v72.67,55.77
N$22  (via drill 0.61)
  Top 0.254: C25.1 88.55,64.4 88.55,67.15 R18.1 88.42,67.03 85.8,67.03 R23.2 85.67,67.15 85.67,68.15 v77.8,68.15 | v70.42,60.77 68.55,58.9 68.55,51.02 70.92,48.65 U4.7
  Bottom 0.254: v77.8,68.15 v70.42,60.77
N$23
  Top 0.206: U1.D+1 64.71,8.91 64.8,9 65.5,9 65.6,9.1 65.6,10.3 R15.2
N$24  (via drill 0.61)
  Top 0.254: C26.1 64.05,35.9 R22.1 64.05,42.77 R21.1 64.17,42.9 65.42,44.15 v65.42,51.15 64.17,52.4 R19.2 64.17,52.52 64.17,55.52 R20.1 | 72.42,47.77 72.42,48.52 U4.5 | 72.42,47.77 72.67,47.52 73.55,47.52 73.55,48.52 U4.3 | v69.05,47.52 72.05,47.52 72.3,47.77 72.42,47.77
  Bottom 0.254: v65.42,51.15 v69.05,47.52
N$25
  Top 0.254: R27.2 83.8,53.52 R26.2 83.92,53.4 86.17,51.15 86.17,48.27 U5.2
N$26
  Top 0.254: 85.55,57.52 85.55,59.65 R25.2 | 85.55,57.52 85.55,56.65 R27.1 85.55,56.52 87.8,54.27 87.8,49.02 87.05,48.27 U5.1 | 85.55,57.52 83.05,57.52 82.8,57.27 82.8,50.52 84.3,49.02 84.3,48.27 U5.5
N$27
  Top 0.254: C30.2 88.92,59.4 88.67,59.15 88.67,56.65 R24.1 88.67,56.52 88.3,56.15 88.3,47.27 85.92,47.27 85.67,47.52 85.67,48.15 U5.3
N$28
  Top 0.254: 83.92,61.02 83.92,59.77 R25.1 | 83.92,61.02 83.92,62.52 C28.2 | 83.92,61.02 88.92,61.02 C30.1
N$29  (via drill 0.61)
  Top 0.254: v79.3,34.65 79.3,33.02 R28.2 | v82.92,46.9 83.67,47.65 83.67,48.15 U5.6 | v81.42,57.77 81.42,58.15 78.92,60.65 R29.2
  Bottom 0.254: v79.3,34.65 79.3,43.27 82.11,46.09 | v82.92,46.9 82.11,46.09 | v81.42,57.77 86.8,52.4 90.05,52.4 90.55,51.9 90.55,51.15 85.42,46.02 82.17,46.02 82.11,46.09
N$30
  Top 0.254: R30.1 77.17,64.03 77.17,60.77 R29.1 77.3,60.65 79.05,58.9 79.05,48.27 82.92,48.27 U5.7
N$31  (via drill 0.61)
  Top 0.254: C32.1 78.67,67.03 78.8,66.9 78.8,64.15 R30.2 78.8,64.03 78.8,63.52 v78.05,62.77 | v77.67,57.4 77.67,36.52 R31.1
  Bottom 0.254: v77.67,57.4 77.67,62.4 v78.05,62.77
N$32
  Top 0.254: R31.2 79.3,36.52 83.05,36.52 C31.1 83.05,36.65 84.3,37.9 84.3,42.4 U5.10
N$33  (via drill 0.61)
  Top 0.254: v68.8,67.28 70.05,67.28 C34.1 | C32.2 77.05,67.15 75.05,69.15 66.17,69.15 v66.17,67.28 64.17,65.28 R33.2 64.17,65.15 64.17,62.02 R34.1 | v84.17,46.9 83.05,45.77 83.05,42.52 U5.8
  Bottom 0.254: v68.8,67.28 v66.17,67.28 66.17,59.77 74.92,51.02 84.8,51.02 85.8,50.02 85.8,49.27 84.17,47.65 v84.17,46.9
N$34  (via drill 0.61)
  Top 0.254: v71.55,63.9 73.8,61.65 R32.2 | R33.1 65.8,65.15 v67.05,63.9 67.05,68.65 74.17,68.65 75.17,67.65 75.17,61.15 78.55,57.77 78.55,41.4 83.3,41.4 83.55,41.65 83.55,42.27 83.67,42.4 U5.9
  Bottom 0.254: v71.55,63.9 v67.05,63.9
N$35
  Top 0.254: 63.49,59.46 64.05,58.9 R35.1 | 63.49,59.46 63.17,59.77 63.17,69.65 89.17,69.65 91.3,67.53 91.3,50.02 92.05,49.27 C35.1 | R34.2 65.8,61.9 63.55,59.65 63.55,59.52 63.49,59.46
N$36
  Top 0.254: C34.2 70.05,65.78 70.05,63.52 C33.1 70.05,63.4 72.42,61.02 72.42,59.4 74.17,59.4 74.67,59.9 74.67,66.53 73.8,67.4 R36.2
N$37  (via drill 0.61)
  Top 0.254: v68.8,61.9 69.92,61.9 C33.2 | v67.05,60.15 65.8,58.9 R35.2 | v89.67,51.52 89.67,44.9 87.05,44.9 85.67,43.52 85.67,42.52 U5.12
  Bottom 0.254: v68.8,61.9 v67.05,60.15 67.05,60.02 75.55,51.52 v89.67,51.52
N$38
  Top 0.254: R37.1 90.3,43.52 86.42,43.52 86.42,42.65 86.3,42.52 U5.13
N$39  (via drill 0.61)
  Top 0.254: v40.8,50.4 42.67,48.52 42.67,39.65 U$13.P$5
  Bottom 0.254: v40.8,50.4 40.8,52.9 C36.1
N$40  (via drill 0.61)
  Top 0.254: v39.42,42.9 40.55,41.77 40.55,39.65 U$13.P$2
  Bottom 0.254: v39.42,42.9 39.42,49.15 C2.2
N$41  (via drill 0.61)
  Top 0.254: v39.3,50.4 41.92,47.77 41.92,39.65 U$13.P$4
  Bottom 0.254: v39.3,50.4 39.3,52.9 C36.2
N$42  (via drill 0.61)
  Top 0.254: v53.8,45.27 57.42,41.65 57.42,39.65 U$13.P$26
  Bottom 0.254: v53.8,45.27 R39.1
N$43  (via drill 0.61)
  Top 0.254: v53.42,50.4 58.05,45.77 58.05,39.65 U$13.P$27
  Bottom 0.254: v53.42,50.4 53.42,52.65 C3.2
N$44  (via drill 0.61)
  Top 0.254: v53.3,54.02 58.8,48.52 58.8,39.65 U$13.P$28
  Bottom 0.254: v53.3,54.02 53.3,55.77 C37.2
N$45
  Top 0.206: U1.ID1 65.36,7.76 66.2,8.6 67.6,8.6 68.1,9.1 68.1,10.29 R43.2
N$46
  Top 0.206: U1.VBUS1 63.41,6.59 63,7 61,7 U$15.1
N$47
  Top 0.206: R42.2 60.73,9.05 U$15.2
N$48  (via drill 0.61)
  Top 0.254: v52.05,30.77 52.05,31.15 53.17,31.15 D3.A
  Bottom 0.254: v52.05,30.77 52.05,31.27 52.8,32.02 R46.1
N$58  (via drill 0.61)
  Top 0.254: v5.67,54.4 5.67,54.52 4.67,55.52 U$6.2 | v14.8,52.27 15.8,53.27 15.8,53.4 R62.2
  Bottom 0.254: v5.67,54.4 12.68,54.4 v14.8,52.27
N$59
  Top 0.254: U$6.7 4.67,60.77 5.3,61.4 5.3,64.53 R63.1
N$60
  Top 0.254: U$6.6 5.92,60.77 5.92,63.4 7.05,64.53 R64.1
N$61
  Top 0.254: D6.C 3.67,66.78 3.67,64.65 R63.2
N$62
  Top 0.254: R64.2 8.8,66.9 D5.C
N$65
  Top 0.254: U$7.5 20.8,62.4 20.8,65.65 C40.1 20.93,65.78 20.93,68.78 R65.1
N$66  (via drill 0.61)
  Top 0.254: T1.3 25.3,61.77 | 25.3,61.77 T1.2 | v25.3,60.65 25.3,61.77 | C40.2 19.3,65.65 19.3,62.77 19.68,62.4 U$7.6 19.8,62.27 20.3,61.77 22.3,61.77 22.3,62.9 | 22.3,62.9 22.3,69.03 21.55,69.78 11.43,69.78 11.43,66.53 C29.- | 22.3,62.9 v22.93,62.9
  Bottom 0.254: BAT1.- 25.3,56.15 v25.3,60.65 25.18,60.65 v22.93,62.9
N$67  (via drill 0.61)
  Top 0.254: v19.68,61.15 19.68,60.15 U$7.1 | v24.05,60.52 24.8,59.77 26.18,59.77 26.18,61.77 T1.4
  Bottom 0.254: v19.68,61.15 23.43,61.15 v24.05,60.52
N$68
  Top 0.254: U$7.2 20.8,60.02 20.8,53.52 R66.2
N$69
  Top 0.254: T1.1 24.3,67.53 T1.8
N$70
  Top 0.254: U$7.3 21.68,60.15 23.8,62.27 23.8,68.15 24.05,68.4 26.18,68.4 26.18,67.65 T1.5
NRST  (via drill 0.4 pad 0.25)
  Top 0.206: v34.05,22.45 34.49,22.01 v35.8,22.01 | v39.14,18.64 39.35,18.85 U$9.7
  Top 0.254: S1.1 27.55,38.65 32.55,38.65 S1.2 32.67,38.52 34.05,37.15 34.05,22.52 v34.05,22.45
  Bottom 0.206: C22.1 36.94,35.92 38.2,34.66 38.2,27 34.05,22.85 v34.05,22.45 | v35.8,22.01 39.14,18.67 v39.14,18.64
  Bottom 0.254: R7.1 31.05,40.9 31.05,37.65 32.8,35.9 36.92,35.9 36.94,35.92
OSC32_IN
  Top 0.206: U$9.3 36.52,20.85 U$4.1
  Top 0.254: C21.2 35.17,19.65 U$4.1
OSC32_OUT
  Top 0.206: U$9.4 37.15,20.35 36.7,19.9 36.7,18.53 U$4.2
  Top 0.254: C20.2 32.67,17.15 35.17,17.15 U$4.2
OSC_IN
  Top 0.206: U$9.5 38.25,19.85 37.2,18.8 37.2,14 36.7,13.5 35.4,13.5 U$2.1
  Top 0.254: C19.2 32.55,13.65 35.05,13.65 U$2.1
OSC_OUT
  Top 0.206: U$9.6 38.85,19.35 37.7,18.2 37.7,12.56 U$2.2
  Top 0.254: C18.2 32.42,10.03 35.05,10.03 U$2.2
OTG_FS_DM  (via drill 0.4 pad 0.25)
  Top 0.206: R14.1 63.23,17.42 v64.3,18.49 | v66.3,19.7 64.91,19.7 64.89,19.69 59.58,19.69 59.44,19.83 55.32,19.83 U$9.44
  Bottom 0.206: v64.3,18.49 64.4,18.49 65.11,17.78 65.69,17.78 66.11,18.2 66.11,19.51 v66.3,19.7
OTG_FS_DP  (via drill 0.4 pad 0.25)
  Top 0.206: R15.1 65.58,18.31 v65.4,18.49 | v64.6,20.4 56.03,20.4 56.03,20.39 55.34,20.39 U$9.45
  Bottom 0.206: v65.4,18.49 65.4,19.6 v64.6,20.4
OTG_FS_ID
  Top 0.206: R43.1 68.08,16.92 65.8,19.2 59.49,19.2 59.27,19.42 56.24,19.42 56.17,19.35 U$9.43
R_ARM
  Top 0.254: PAD1.1 81.8,6.03 81.3,6.53 81.3,13.15 U$8.P$2 81.3,13.28 81.3,19.15 U$8.P$1 81.3,19.27 87.42,25.4 87.42,33.4 90.05,36.02 R2.2
SWTCK
  Top 0.254: U$9.49 53.42,23.77 71.67,23.77 71.67,1.15 71.17,0.65 32.42,0.65 32.42,2.77 JP2.3
SWTDIO  (via drill 0.4 pad 0.25)
  Top 0.206: v40.91,10.21 39.5,10.21 39.49,10.22 38.14,10.22 35.57,7.65 35.57,3.5 JP2.4 | v52.9,20.9 54.57,20.9 54.57,20.89 55.26,20.89 U$9.46
  Bottom 0.206: v40.91,10.21 41.12,10 53.5,10 53.59,10.09 53.59,10.29 54.01,10.71 54.59,10.71 54.9,10.4 55.6,10.4 55.6,12.2 53.8,14 53.8,19.2 52.7,20.3 52.7,20.7 v52.9,20.9
VBUS  (via drill 0.61)
  Top 0.206: R42.1 60.73,17.38 59.1,19.01 56.41,19.01 56.25,18.85 U$9.42
  Top 0.254: D5.A 7.3,66.9 5.17,66.9 D6.A 5.05,66.9 4.3,67.65 2.67,67.65 2.67,60.02 | 6.86,51.96 6.3,51.4 4.05,51.4 4.05,53.52 2.67,54.9 2.67,59.9 | 6.86,51.96 7.05,52.15 7.05,55.52 U$6.4 | 2.67,60.02 2.67,59.9 | 2.67,60.02 3.3,60.65 U$6.8 | 2.67,59.9 6.17,59.9 6.42,60.15 6.42,61.52 7.42,61.52 7.8,61.15 7.8,61.02 12.3,61.02 C38.A | v36.42,3.77 47.17,3.77 47.8,3.15 47.8,2.65 54.92,2.65 58.55,6.28 58.55,9.9 60.67,12.03 R42.1 | v9.55,48.27 8.93,48.9 8.93,49.9 6.86,51.96
  Bottom 0.254: v36.42,3.77 34.3,5.9 30.43,5.9 9.55,26.77 v9.55,48.27
VCC  (via drill 0.61)
  Top 0.254: v44.42,49.52 43.55,48.65 43.55,39.65 U$13.P$6 43.55,39.52 43.55,37.52 | v47.42,28.52 47.05,28.9 47.05,36.27 | 47.05,36.27 47.05,39.52 U$13.P$11 | 45.67,37.52 45.67,39.4 45.55,39.52 U$13.P$9 | 45.67,37.52 46.92,36.27 47.05,36.27 | 43.55,37.52 43.8,37.27 45.55,37.27 45.55,37.52 45.67,37.52 | v29.3,53.02 28.8,52.52 28.8,51.77 IC1.1 28.68,51.65 28.68,50.77 27.3,50.77 27.05,51.02 | 27.05,51.02 27.05,51.52 26.93,51.65 IC1.3 | v9.55,52.4 8.43,52.4 SW1.CH1A | 26.18,39.4 26.18,50.27 26.93,51.02 27.05,51.02 | 26.18,39.4 26.18,34.52 27.93,32.77 27.93,3.4 27.43,2.9 JP2.1 | 26.18,39.4 33.42,39.4 34.55,38.27 34.55,37.27 43.17,37.27 43.42,37.52 43.55,37.52
  Bottom 0.254: v44.42,49.52 47.67,52.77 R38.1 | v47.42,28.52 50.42,25.52 51.55,25.52 53.67,27.65 59.17,27.65 69.92,38.4 70.42,38.4 R47.2 | C5.2 29.3,54.65 v29.3,53.02 29.18,53.02 27.55,51.4 14.43,51.4 13.43,52.4 v9.55,52.4
VDDA  (via drill 0.4 pad 0.25, 0.61)
  Top 0.206: v38.4,22.1 v41.8,22.1 | v41.3,16.01 41.46,15.85 U$9.13
  Top 0.254: v34.92,59.9 34.92,60.77 35.17,61.02 U$3.2
  Bottom 0.206: C12.2 43.6,58.56 43.6,39.1 46.1,36.6 46.1,30.5 38.4,22.8 v38.4,22.1 | v41.3,16.01 41.3,16.96 41.68,17.35 41.68,21.98 v41.8,22.1
  Bottom 0.254: C12.2 41.67,60.52 39.17,60.52 C13.2 39.05,60.4 36.17,60.4 C14.2 | v34.92,59.9 35.67,59.9 36.05,60.27 C14.2 | C15.2 32.92,60.27 35.92,60.27 C14.2

## Text on the board
tPlace: NICBP v3 | 201908 / TonyGUO